# Altium PCB xxxxxx.001.PcbDoc (part 2 of 2)
Units mm, origin at the board's own origin, x right, y up, seen from the top; angles counter-clockwise.
Board outline 100 x 45 mm, 4 copper layers (Top Layer, GND Layer, Power Layer, Bottom Layer), stack 1.466 mm thick; 65 components, 66 nets, 294 pads, 231 vias.
Unrouted connection lines stored in the file: 84.
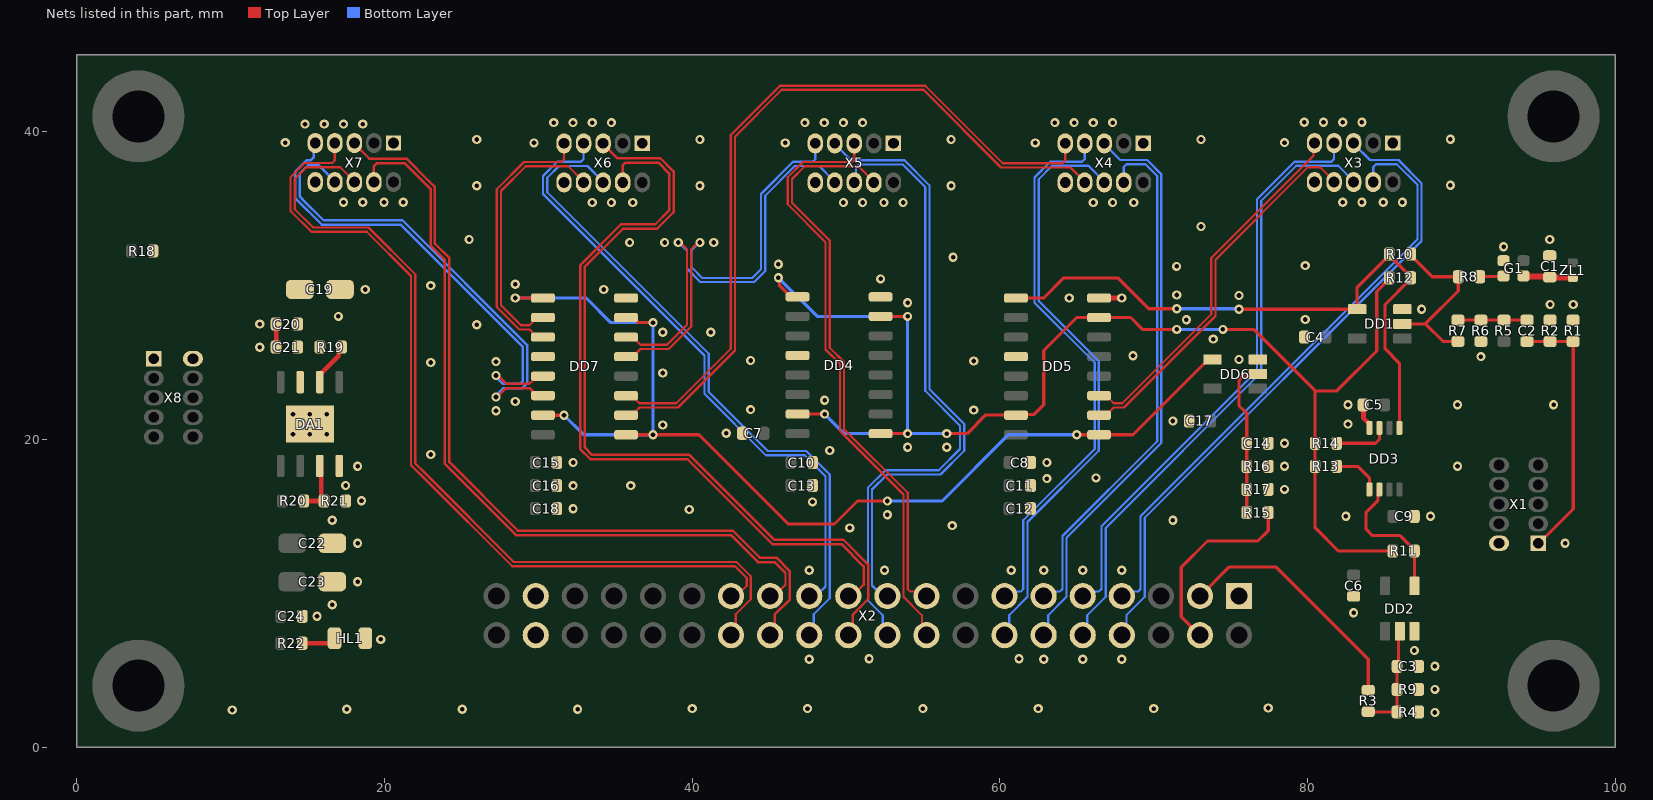
[diagram p4: the nets of this part, all layers, seen from the top]

## Via types
v1: diameter 0.6, hole 0.3, Top Layer to Bottom Layer, tented both sides, 225 vias
v2: diameter 0.6, hole 0.3, Top Layer to Bottom Layer, 6 vias

## Nets (pads, with @x,y where several pads share a name; then routed paths per layer and width w, separated by ;. In a path a pad name is that pad's centre, name@x,y a point inside that pad or via, vN(x,y) a via of type N, cw(c..) or ccw(c..) an arc to the next point about the centre after c; other vN are vias at no path point) (continued)
GND: C1.2 C3.2 C4.2 C5.2 C6.2 C7.2 C8.2 C9.2 C10.2 C11.2 C12.2 C13.2 C14.2 C15.2 C16.2 C17.2 C18.2 C19.2 C20.2 C21.2 C22.2 C23.2 C24.2 DA1.8 DA1.9 DD1.3 DD2.3 DD3.4 DD4.8 DD4.12 DD5.8 DD5.12 DD6.3 DD7.8 DD7.12 G1.2 HL1.2 R1.2 R2.2 R4.2 R6.2 R9.2 R16.2 R17.2 R21.2 X1.2 X2.1 X2.37 X2.38 X3.1 X3.10 X4.1 X4.10 X5.1 X5.10 X6.1 X6.10 X7.1 X7.10 X8.2 | length 4.6
  Top Layer w0.3: C21.2@12.95,26 C20.2@12.95,27.5 ; DD5.8@66.45,29.195 v1(67.93,29.195) ; C5.2@83.615,22.25 83.642,22.223 83.642,21.383 83.975,21.05 83.975,20.8 DD3.4@84.025,20.75
  other v1: 88.285,2.25 10.1,2.415 17.55,2.457 25.05,2.457 32.55,2.457 40,2.5 47.5,2.5 55,2.5 62.5,2.5 70,2.5 77.45,2.543 88.285,3.75 88.285,5.25 47.61,5.709 62.85,5.709 65.39,5.709 67.93,5.709 51.5,5.75 61.25,5.75 86.95,6.281 19.75,7 15.61,8.5 83,8.74 16.6,9.25 18.25,10.75 47.61,11.5 52.5,11.5 60.75,11.5 62.85,11.5 65.39,11.5 67.93,11.5 18.25,13.25 96.75,13.25 50.25,14.25 56.911,14.397 16.6,14.75 71.25,14.75 82.5,15 88,15 52.69,15.106 39.817,15.449 32.26,15.5 47.822,15.94 18.5,16.02 78.51,16.75 17.47,17.008 32.26,17 36,17 63.06,17.455 66.25,17.5 18.25,18.25 78.51,18.25 89.75,18.25 32.26,18.5 63.06,18.5 23,19.02 48.946,19.28 54.007,19.486 56.551,19.486 78.51,19.75 42.208,20.4 38.085,20.94 82.635,21 71.25,21.2 27.25,21.867 58.3,21.906 43.8,21.942 82.635,22.25 89.75,22.25 96,22.25 28.5,22.469 48.607,22.544 38.082,24.318 23,25 27.25,25.061 58.3,25.1 43.8,25.136 75.55,25.2 91.275,25.385 68.655,25.435 11.89,26 73.868,26.521 38.082,26.965 41.215,26.965 26,27.449 11.89,27.5 72.132,27.786 79.85,27.8 17,28 87.419,28.465 95.775,28.77 97.275,28.77 54.007,28.894 64.511,29.195 75.55,29.359 71.5,29.394 18.75,29.75 34.25,29.75 23,30 28.5,30.089 52.25,30.437 71.491,31.25 79.85,31.304 45.608,31.394 56.964,31.845 92.75,32.531 35.933,32.8 38.206,32.8 41.4,32.8 25.5,33 95.75,33 73.08,33.845 33.5,35.4 34.75,35.4 36.133,35.4 49.83,35.4 51.08,35.4 52.463,35.4 53.713,35.4 66.08,35.4 67.33,35.4 68.713,35.4 17.33,35.42 18.58,35.42 19.963,35.42 21.213,35.42 82.29,35.42 83.54,35.42 84.923,35.42 86.173,35.42 26,36.5 40.5,36.5 56.83,36.5 89.29,36.52 29.72,39.28 46.05,39.28 62.3,39.28 13.55,39.3 78.51,39.3 26,39.5 40.5,39.5 56.83,39.5 73.08,39.5 89.29,39.52 14.83,40.5 16.08,40.5 17.33,40.5 18.58,40.5 31,40.6 32.25,40.6 33.5,40.6 34.75,40.6 47.33,40.6 48.58,40.6 49.83,40.6 51.08,40.6 63.58,40.6 64.83,40.6 66.08,40.6 67.33,40.6 79.79,40.62 81.04,40.62 82.29,40.62 83.54,40.62
  other v2: 14.05,20.35 15.15,20.35 16.25,20.35 14.05,21.65 15.15,21.65 16.25,21.65
NetC1_1: C1.1 G1.4 ZL1.2 | length 3.3
  Top Layer w0.4: G1.4@94.05,30.625 94.088,30.588 95.712,30.588 C1.1@95.75,30.55 95.775,30.525 97.225,30.525 ZL1.2@97.25,30.5
NetC2_1: C2.1 R1.1 R2.1 X1.1 | length 17.1
  Top Layer w0.206: C2.1@94.275,26.365 R2.1@95.775,26.365 R1.1@97.275,26.365 97.275,15.475 95.05,13.25 X1.1@95,13.25
NetC2_2: C2.2 R5.2 R6.1 R7.1 | length 4.5
  Top Layer w0.206: R7.1@89.775,27.765 R6.1@91.275,27.765 R5.2@92.775,27.765 C2.2@94.275,27.765
NetC3_1: C3.1 DD2.2 R3.2 R4.1 R9.1 | length 7.2
  Top Layer w0.206: R3.2@83.95,2.3 83.96,2.29 85.815,2.29 R4.1@85.825,2.28 R9.1@85.825,3.75 C3.1@85.825,5.25 85.912,5.337 85.912,7.437 DD2.2@86,7.525
NetC14_1: C14.1 DD6.2 R15.2 R16.1 R17.1 | length 10.2
  Top Layer w0.206: R15.2@76.05,15.25 R16.1@76.05,18.25 C14.1@76.05,19.75 76.05,21.7 75.55,22.2 75.55,23.859 75.791,24.1 76.625,24.1 DD6.2@76.775,24.25
NetC19_1: C19.1 C20.1 C21.1 DA1.3 R18.2 R19.1 X8.1
NetDA1_2: DA1.2 R19.2 | length 2.9
  Top Layer w0.3: DA1.2@15.785,23.725 15.785,24.2 17.015,25.43 17.015,25.815 R19.2@17.2,26
NetDA1_7: DA1.7 R20.2 R21.1 | length 3.7
  Top Layer w0.3: R20.2@14.75,16 R21.1@16.07,16 15.893,16.177 15.893,17 15.885,17.008 15.885,18.175 DA1.7@15.785,18.275
NetDD1_2: DD1.2 R7.2 R8.2 R10.1 | length 11.8
  Top Layer w0.206: DD1.2@86.175,27.515 87.665,27.515 ; R10.1@86.715,32.05 86.715,31.975 88.115,30.575 R8.2@89.8,30.575 89.8,29.65 87.665,27.515 ; R7.2@89.775,26.365 88.815,26.365 87.665,27.515
NetDD1_4: DD1.4 DD3.1 DD5.9 R10.2 R12.1 | length 40.9
  Top Layer w0.206: DD5.9@61.05,29.195 62.855,29.195 64.16,30.5 67.678,30.5 69.678,28.5 v1(71.5,28.5) ; v1(75.55,28.465) DD1.4@83.225,28.465 83.225,29.885 85.315,31.975 R10.2@85.315,31.98 ; R10.2@85.315,32.05 R10.2@85.315,31.98 ; DD3.1@85.975,20.75 85.975,24.959 85.05,25.884 85.05,28.77 86.715,30.435 R12.1@86.715,30.51 86.715,30.58 R10.2@85.315,31.98
  Bottom Layer w0.206: v1(71.5,28.5) 75.515,28.5 v1(75.55,28.465)
NetDD2_4: DD2.4 DD3.6 R11.1 | length 9
  Top Layer w0.206: DD3.6@84.675,16.75 84.578,16.653 84.578,16.025 83.815,15.262 83.815,14.162 84.227,13.75 86.025,13.75 86.95,12.825 R11.1@86.95,12.75 DD2.4@86.95,10.475
NetDD3_3: DD3.3 R14.1 | length 3.6
  Top Layer w0.206: R14.1@81.9,19.75 84.425,19.75 84.675,20 DD3.3@84.675,20.75
NetDD3_5: DD3.5 R13.1 | length 3.2
  Top Layer w0.206: R13.1@81.9,18.25 83.275,18.25 84.025,17.5 DD3.5@84.025,16.75
NetDD4_1: DD4.1 DD4.7 DD4.9 DD4.15 DD5.7 DD5.15 R11.2 R12.2 R13.2 R14.2 | length 88.7
  Top Layer w0.206: v1(45.608,30.512) 45.683,30.437 45.683,29.987 46.4,29.27 DD4.9@46.85,29.27 ; DD4.15@46.85,21.65 v1(48.607,21.65) ; DD4.1@52.25,20.38 v1(54.007,20.38) ; DD4.7@52.25,28 v1(54.007,28) ; v1(56.551,20.38) 57.876,20.38 59.091,21.594 DD5.15@61.069,21.594 ; DD5.15@61.089,21.614 62.208,21.614 62.855,22.261 62.855,25.78 65,27.925 DD5.7@66.45,27.925 68.5,27.925 69.271,27.154 v1(71.5,27.154) ; v1(74.5,27.154) 76.5,27.154 80.5,23.154 ; R12.2@85.315,30.51 85.315,30.435 84.5,29.62 84.5,25.75 81.904,23.154 80.5,23.154 ; R11.2@85.55,12.75 82,12.75 80.5,14.25 R13.2@80.5,18.25 R14.2@80.5,19.75 80.5,23.154
  Bottom Layer w0.206: v1(45.608,30.512) 48.12,28 v1(54.007,28) v1(54.007,20.38) ; v1(48.607,21.65) 49.877,20.38 v1(54.007,20.38) ; v1(56.551,20.38) v1(54.007,20.38) ; v1(71.5,27.154) v1(74.5,27.154)
NetDD5_1: DD5.1 DD6.4 DD7.1 DD7.7 DD7.9 DD7.15 | length 73.2
  Top Layer w0.206: v1(28.5,29.195) DD7.9@30.3,29.195 ; DD7.15@30.3,21.575 v1(31.67,21.575) ; DD7.1@35.7,20.305 v1(37.457,20.305) 40.445,20.305 46.25,14.5 49.25,14.5 50.75,16 v1(52.69,16) ; DD7.7@35.7,27.925 36.2,27.925 36.528,27.597 v1(37.45,27.597) ; v1(65,20.305) DD5.1@66.45,20.305 68.655,20.305 73.55,25.2 DD6.4@73.825,25.2
  Bottom Layer w0.206: v1(28.5,29.195) 33.112,29.195 34.71,27.597 v1(37.45,27.597) 37.453,27.594 37.453,20.308 v1(37.457,20.305) 32.94,20.305 v1(31.67,21.575) ; v1(52.69,16) 56.25,16 60.555,20.305 v1(65,20.305)
NetG1_3: G1.3 R8.1 | length 1.6
  Top Layer w0.206: R8.1@91.2,30.575 91.225,30.6 92.725,30.6 G1.3@92.75,30.625
NetHL1_1: HL1.1 R22.2 | length 2.3
  Top Layer w0.3: R22.2@14.65,6.75 16.456,6.75 16.75,7.044 HL1.1@16.75,7.075
NetR3_1: R3.1 X2.3 | length 16.2
  Top Layer w0.206: X2.3@73.01,9.815 74.895,11.7 77.959,11.7 83.95,5.709 R3.1@83.95,3.7
SCK1_N: DD5.3 X3.9 | length 23.8
  Top Layer w0.146: DD5.3@66.45,22.845 66.899,22.845 67.398,22.346 67.961,22.346 73.748,28.134 73.748,31.795 80.393,38.441 80.393,39.203 X3.9@80.46,39.27
SCK1_P: DD5.2 X3.8 | length 24.5
  Top Layer w0.146: DD5.2@66.45,21.575 66.899,21.575 67.398,22.074 68.074,22.074 74.021,28.021 74.021,31.682 80.026,37.688 80.822,37.688 81.73,36.78 X3.8@81.73,36.73
SCK2_N: DD7.3 X4.9 | length 48.8
  Top Layer w0.146: DD7.3@35.7,22.845 36.133,22.845 36.402,22.576 36.402,22.517 36.573,22.346 38.958,22.346 42.508,25.897 42.508,39.795 45.713,43 55.148,43 60.191,37.956 64.079,37.956 64.25,38.127 X4.9@64.25,39.25
SCK2_P: DD7.2 X4.8 | length 49.3
  Top Layer w0.146: DD7.2@35.7,21.575 36.133,21.575 36.402,21.844 36.402,21.903 36.573,22.074 39.071,22.074 42.781,25.784 42.781,39.682 45.826,42.727 55.035,42.727 60.078,37.684 64.596,37.684 65.52,36.76 X4.8@65.52,36.71
SCK3_N: DD7.5 X5.9 | length 28.1
  Top Layer w0.146: DD7.5@35.7,25.385 36.149,25.385 36.648,25.884 38.484,25.884 39.936,27.336 39.936,32.371 40.107,32.542 40.119,32.542 40.377,32.8 v1(40.5,32.8)
  Bottom Layer w0.146: v1(40.5,32.8) 40.458,32.8 39.936,32.278 39.936,31.22 40.657,30.5 43.901,30.5 44.47,31.069 44.47,35.96 46.558,38.048 47.829,38.048 48,38.219 X5.9@48,39.25
SCK3_P: DD7.6 X5.8 | length 28.8
  Top Layer w0.146: DD7.6@35.7,26.655 36.149,26.655 36.648,26.156 38.371,26.156 39.664,27.449 39.664,32.371 39.493,32.542 39.481,32.542 39.223,32.8 v1(39.1,32.8)
  Bottom Layer w0.146: v1(39.1,32.8) 39.142,32.8 39.664,32.278 39.664,31.107 40.544,30.227 44.014,30.227 44.743,30.956 44.743,35.847 46.671,37.775 48.255,37.775 49.27,36.76 X5.8@49.27,36.71
SCK4_N: DD7.11 X6.9 | length 17.7
  Top Layer w0.146: DD7.11@30.3,26.655 29.867,26.655 29.598,26.924 29.598,26.983 29.427,27.154 28.761,27.154 27.302,28.612 27.302,36.261 29.072,38.031 31.499,38.031 31.67,38.202 X6.9@31.67,39.25
SCK4_P: DD7.10 X6.8 | length 17.4
  Top Layer w0.146: DD7.10@30.3,27.925 29.867,27.925 29.598,27.656 29.598,27.597 29.427,27.426 28.874,27.426 27.575,28.725 27.575,36.148 29.185,37.758 31.942,37.758 32.94,36.76 X6.8@32.94,36.71
SCK5_N: DD7.13 X7.9 | length 30.9
  Top Layer w0.162: v1(27.25,24.161) 27.368,24.161 27.904,23.625 29.416,23.625 29.606,23.815 29.606,23.859 29.862,24.115 DD7.13@30.3,24.115
  Bottom Layer w0.162: X7.9@15.5,39.27 15.409,39.179 15.409,38.35 15.219,38.16 14.956,38.16 14.211,37.414 14.211,35.669 15.919,33.961 21.039,33.961 29,26 29,23.795 28.81,23.605 27.98,23.605 27.711,23.605 27.25,24.067 v1(27.25,24.161)
SCK5_P: DD7.14 X7.8 | length 31.7
  Top Layer w0.162: v1(27.25,22.761) 27.328,22.761 27.903,23.335 29.416,23.335 29.606,23.145 29.606,23.101 29.862,22.845 DD7.14@30.3,22.845
  Bottom Layer w0.162: X7.8@16.77,36.73 16.77,36.78 15.68,37.87 15.076,37.87 14.5,37.294 14.5,35.789 14.68,35.609 16.039,34.25 21.159,34.25 29.289,26.12 29.289,23.676 28.93,23.316 28.1,23.316 27.711,23.316 27.25,22.855 v1(27.25,22.761)
SCK_IN: R15.1 X2.4 | length 12.7
  Top Layer w0.206: X2.4@73.01,7.275 71.8,8.485 71.8,11.7 73.5,13.4 76.775,13.4 77.45,14.075 R15.1@77.45,15.25
SDA_11_N: X2.7 X3.4 | length 39.6
  Bottom Layer w0.146: X2.7@67.93,9.815 68.222,10.107 68.978,10.107 69.149,10.278 69.149,15.015 87.146,33.012 87.146,36.55 85.809,37.887 84.45,37.887 84.28,37.716 84.28,36.74 X3.4@84.27,36.73
SDA_11_P: X2.8 X3.5 | length 43
  Bottom Layer w0.146: X2.8@67.93,7.275 68.227,7.572 68.227,8.576 69.422,9.771 69.422,14.902 87.419,32.899 87.419,36.663 85.922,38.16 84.06,38.16 83,39.22 X3.5@83,39.27
SDA_12_N: X2.9 X3.7 | length 38.1
  Bottom Layer w0.146: X2.9@65.39,9.815 65.682,10.107 66.438,10.107 66.609,10.278 66.609,14.359 76.727,24.477 76.727,35.634 79.152,38.058 81.559,38.058 81.73,38.229 X3.7@81.73,39.27
SDA_12_P: X2.10 X3.6 | length 40.5
  Bottom Layer w0.146: X2.10@65.39,7.275 65.687,7.572 65.687,8.576 66.882,9.771 66.882,14.246 77,24.364 77,35.521 79.265,37.786 81.994,37.786 83,36.78 X3.6@83,36.73
SDA_21_N: X2.11 X4.4 | length 34.4
  Bottom Layer w0.146: X2.11@62.85,9.815 63.142,10.107 63.898,10.107 64.069,10.278 64.069,13.728 70.227,19.886 70.227,37.127 69.468,37.887 68.231,37.887 68.06,37.716 X4.4@68.06,36.71
SDA_21_P: X2.12 X4.5 | length 37.7
  Bottom Layer w0.146: X2.12@62.85,7.275 63.147,7.572 63.147,8.576 64.342,9.771 64.342,13.615 70.5,19.773 70.5,37.24 70.42,37.32 69.661,38.08 69.581,38.16 67.83,38.16 66.79,39.2 X4.5@66.79,39.25
SDA_22_N: X2.13 X4.7 | length 36.5
  Bottom Layer w0.146: X2.13@60.31,9.815 60.602,10.107 61.358,10.107 61.529,10.278 61.529,14.75 66.166,19.386 66.166,24.98 62.338,28.807 62.258,28.887 62.258,37.035 63.282,38.058 65.349,38.058 65.52,38.229 X4.7@65.52,39.25
SDA_22_P: X2.14 X4.6 | length 38.9
  Bottom Layer w0.146: X2.14@60.31,7.275 60.607,7.572 60.607,8.576 61.802,9.771 61.802,14.637 66.438,19.273 66.438,25.093 62.531,29 62.531,36.922 63.395,37.786 65.764,37.786 66.79,36.76 X4.6@66.79,36.71
SDA_31_N: X2.17 X5.4 | length 37.3
  Top Layer w0.146: X5.4@51.81,36.71 51.81,36.76 50.812,37.758 47.315,37.758 46.492,36.935 46.492,35.395 48.946,32.941 48.946,25.961 49.877,25.031 49.877,20.666 54.011,16.531 54.011,10.278 54.182,10.107 54.938,10.107 X2.17@55.23,9.815
SDA_31_P: X2.18 X5.5 | length 39.4
  Top Layer w0.146: X5.5@50.54,39.25 50.54,38.202 50.369,38.031 47.202,38.031 46.219,37.048 46.219,35.282 48.674,32.828 48.674,25.848 49.604,24.918 49.604,20.553 53.738,16.418 53.738,9.771 54.933,8.576 54.933,7.572 X2.18@55.23,7.275
SDA_32_N: X2.19 X5.7 | length 40.1
  Bottom Layer w0.146: X5.7@49.27,39.25 49.27,39.2 50.327,38.143 53.8,38.143 55.42,36.523 55.42,23.274 57.69,21.004 57.69,19.273 56.144,17.727 52.684,17.727 51.695,16.739 51.695,10.502 52.382,9.815 X2.19@52.69,9.815
SDA_32_P: X2.20 X5.6 | length 41.3
  Bottom Layer w0.146: X5.6@50.54,36.71 50.658,36.828 50.658,37.7 50.829,37.87 53.687,37.87 55.147,36.41 55.147,23.161 57.417,20.891 57.417,19.386 56.031,18 52.571,18 51.422,16.852 51.422,9.547 52.393,8.576 52.393,7.572 X2.20@52.69,7.275
SDA_41_N: X2.21 X6.4 | length 50.2
  Top Layer w0.162: X6.4@35.48,36.71 35.48,37.806 35.67,37.996 37.804,37.996 38.5,37.3 38.5,34.889 37.6,33.989 35.38,33.989 32.711,31.32 32.711,19.38 33.38,18.711 39.697,18.711 45.208,13.2 49.7,13.2 51.148,11.752 51.148,10.554 50.41,9.815 X2.21@50.15,9.815
SDA_41_P: X2.22 X6.5 | length 53.7
  Top Layer w0.162: X6.5@34.21,39.25 34.21,39.2 35.125,38.285 37.924,38.285 38.789,37.42 38.789,34.769 37.72,33.7 35.5,33.7 33,31.2 33,19.5 33.5,19 39.817,19 45.328,13.489 49.82,13.489 51.437,11.872 51.437,9.609 50.444,8.616 50.444,7.569 X2.22@50.15,7.275
SDA_42_N: X2.23 X6.7 | length 41.2
  Bottom Layer w0.146: X6.7@32.94,39.25 32.94,38.219 32.769,38.048 31.227,38.048 30.3,37.121 30.3,35.956 40.804,25.452 40.804,22.965 44.791,18.977 47.311,18.977 48.674,17.614 48.674,10.434 48.503,10.263 48.478,10.263 48.031,9.815 X2.23@47.61,9.815
SDA_42_P: X2.24 X6.6 | length 43.8
  Bottom Layer w0.146: X6.6@34.21,36.71 34.21,36.76 33.195,37.775 31.34,37.775 30.573,37.008 30.573,36.069 41.076,25.565 41.076,23.078 44.904,19.25 47.424,19.25 48.946,17.727 48.946,9.669 47.907,8.63 47.907,7.572 X2.24@47.61,7.275
SDA_51_N: X2.25 X7.4 | length 50.9
  Top Layer w0.162: X7.4@19.31,36.73 19.31,37.775 19.5,37.966 21.311,37.966 22.795,36.481 22.991,36.286 22.991,32.6 23.921,31.669 23.921,18.404 28.54,13.785 42.515,13.785 44.275,12.025 45.349,12.025 46.067,11.307 46.067,10.555 45.327,9.815 X2.25@45.07,9.815
SDA_51_P: X2.26 X7.5 | length 54.5
  Top Layer w0.162: X7.5@18.04,39.27 18.04,39.22 19.005,38.255 21.431,38.255 22.901,36.785 23.28,36.406 23.28,32.72 24.211,31.789 24.211,18.524 28.66,14.074 42.635,14.074 44.395,12.314 45.469,12.314 46.356,11.427 46.356,9.608 45.364,8.616 45.364,7.569 X2.26@45.07,7.275
SDA_52_N: X2.27 X7.7 | length 55.2
  Top Layer w0.146: X7.7@16.77,39.27 16.77,38.137 16.599,37.966 14.81,37.966 13.887,37.043 13.887,34.858 13.967,34.778 15.245,33.5 18.852,33.5 21.727,30.625 21.727,18.33 22.602,17.455 28.305,11.752 42.789,11.752 43.541,11 43.541,10.487 42.869,9.815 X2.27@42.53,9.815
SDA_52_P: X2.28 X7.6 | length 57.7
  Top Layer w0.146: X7.6@18.04,36.73 18.04,36.78 17.127,37.693 14.923,37.693 14.16,36.929 14.16,34.971 15.358,33.773 18.965,33.773 22,30.738 22,18.443 22.693,17.75 28.418,12.025 42.902,12.025 43.814,11.113 43.814,9.617 42.827,8.63 42.827,7.572 X2.28@42.53,7.275
pads on no net: DA1.1 DA1.4 DA1.5 DD1.1 DD2.1 DD6.1 G1.1 X1.3 X1.4 X1.5 X1.6 X1.7 X1.8 X1.9 X1.10 X2.29 X2.30 X2.31 X2.32 X2.33 X2.34 X2.35 X2.36 X2.39 X2.40 X8.3 X8.4 X8.5 X8.6 X8.7 X8.8 X8.9 X8.10

## Polygon pours and split planes (outlines as drawn)
GND on Top Layer "NONET" (solid, remove dead copper, pour order 23): 0,45 0,0 100,0 100,45
NetC19_1 on Top Layer "Top Layer-NetC19_1" (solid, pour order 14): 13.785,25.15 13.887,25.05 13.887,23.408 15.286,23.408 15.286,24.631 16.5,25.498 16.5,27.656 15.801,28.355 15.801,29.026 15.787,31.614 13.628,33.773 5.023,33.773 4.25,33 4.25,30.75 2.5,29 2.5,24.25 3.605,23.145 10.33,23.145 11,23.815 11,28 11.612,28.612 13.386,28.612 13.785,28.213
+3,3VDD on Top Layer "NONET" (solid, pour order 0): 98.992,30.955 98.992,33.259 98.251,34 96.704,34 96.704,30.977 96.726,30.955
+3,3VDD on Top Layer "NONET" (solid, remove dead copper, pour order 20): 10.377,18.611 15.243,18.611 15.243,17.008 14.404,15.25 14.743,14.75 15.243,14.25 15.243,9.655 14.837,9.25 14,9.25 14,5.85 13.65,5.5 9.5,5.5 9,6 9,17.497
+5VDD on Top Layer "NONET" (solid, pour order 13): 4,33 3.25,33.75 3.25,33.773 1.023,33.773 0.25,33 0.25,30.682 0.67,30.262 3.638,30.262 4,30.625
+3,3VDD on Top Layer "NONET" (solid, pour order 11): 27.751,19.75 28.805,20.804 31.7,20.804 31.7,19.811 30.5,18.611 30.5,15.25 28.5,15.25 27.751,15.999 27.751,19.739 28.794,20.782
+3,3VDD on Top Layer "NONET" (solid, pour order 8): 59.049,20.804 62.5,20.804 62.5,19.811 61.3,18.611 61.3,13.031 60.802,12.533 58.442,12.533 57.638,13.337 57.638,19.393
+3,3VDD on Top Layer "NONET" (solid, pour order 7): 47.122,16.225 47.122,18.872 48,19.75 48.5,20.25 48.5,20.85 48.35,21 46.227,21 45.153,22.074 44.709,22.074 43.886,21.25 43.886,17.564 45.655,15.795 46.692,15.795
+3,3VDD on Top Layer "NONET" (solid, pour order 5): 81.025,12.161 81.364,12.5 84.65,12.5 86.025,11.125 86.025,9.55 85.725,9.25 84.275,9.25 83.789,9.736 83.789,10.475 81.475,10.475 81.025,10.925
+3,3VDD on Top Layer "NONET" (solid, pour order 3): 83.687,27.597 80.993,27.597 80.822,27.426 80.822,24.427 80.932,24.318 82.361,24.318 83.891,25.851 83.891,27.394
+3,3VDD on Top Layer "NONET" (solid, pour order 2): 74.5,24.318 75.25,23.568 75.25,17.008 74.774,16.531 73.218,16.531 73.01,16.74 73.01,21.82 72.31,22.52 72.31,23.618 73.01,24.318
+3,3VDD on Top Layer "NONET" (solid, pour order 1): 85.298,18 86.595,18 86.845,17.75 86.845,16.25 86.292,15.697 86.25,15.697 86.25,14.325 86,14.075 84.85,14.075 84.578,14.347 84.578,15.588 85.015,16.025 85,17.7
GND on Bottom Layer "NONET" (solid, remove dead copper, pour order 21): 0,45 0,0 100,0 100,45
+5VDD on Bottom Layer "NONET" (solid, remove dead copper, pour order 16): 0.25,0.5 78.5,0.5 79.25,1.25 79.25,11.75 78.75,12.25 72.382,12.25 71.75,11.618 71.75,5.689 71.311,5.25 18.5,5.25 10.75,13 10.75,25 4.25,31.5 4.25,33.25 3.5,34 1.25,34 0.25,33
GND on Power Layer "NONET" (solid, pour order 22): 0,45 0,0 100,0 100,45
+3,3VDD on Power Layer "NONET" (solid, pour order 18): 9.75,0.5 9,1.25 9,13.5 10.25,14.75 21.75,14.75 26,19 43.674,19 44.424,18.25 46.596,18.25 47.469,17.377 47.469,12.219 46.5,11.25 46.5,6 47.25,5.25 52,5.25 52.75,6 52.75,14.25 53.606,15.106 56.481,15.106 59.875,18.5 61.75,18.5 62,18.25 62,16.5 61.25,15.75 61.25,13.08 60.31,12.14 60.31,5.917 60.977,5.25 77,5.25 79.25,7.5 79.25,11.695 78.389,12.556 74.796,12.556 72.801,14.551 72.801,16.8 74.764,18.763 79.25,23.249 88,31.999 91.001,35 98.75,35 99.5,34.25 99.5,1.25 98.75,0.5
GND on GND Layer "NONET" (solid, pour order 19): 0,45 0,0 100,0 100,45

## Keep-outs
Power Layer:
  lines w0.25: 9,1.25 9.75,0.5 90.25,0.5 97.375,0.5 98.75,0.5 99.5,1.25 99.5,34.25 98.75,35 91.001,35 88,31.999 79.25,23.249 74.764,18.763 72.801,16.8 72.801,14.551 74.796,12.556 78.389,12.556 79.25,11.695 79.25,10.67 79.25,7.5 77,5.25 60.978,5.25 60.31,5.917 60.31,12.14 61.25,13.08 61.25,15.75 62,16.5 62,18.25 61.75,18.5 59.875,18.5 56.481,15.106 53.606,15.106 52.75,14.25 52.75,6 52,5.25 47.25,5.25 46.5,6 46.5,11.25 47.469,12.219 47.469,17.377 46.596,18.25 44.424,18.25 43.674,19 26,19 21.75,14.75 10.25,14.75 9,13.5 9,1.25
Bottom Layer:
  lines w0.25: 0.25,0.5 0.25,8.25 0.25,33 1.25,34 3.5,34 4.25,33.25 4.25,31.5 10.75,25 10.75,13 18.5,5.25 71.311,5.25 71.75,5.689 71.75,11.618 72.382,12.25 78.75,12.25 79.25,11.75 79.25,1.25 78.5,0.5 9.75,0.5 0.25,0.5
Keep-Out Layer:
  region: 26.6,22.811 26.6,24.111 cw(c27.25,24.111) 27.9,24.111 27.9,22.811 cw(c27.25,22.811)
  region: 43.15,22.886 43.15,24.186 cw(c43.8,24.186) 44.45,24.186 44.45,22.886 cw(c43.8,22.886)
  region: 39.15,33.45 40.45,33.45 cw(c40.45,32.8) 40.45,32.15 39.15,32.15 cw(c39.15,32.8)
  region: 57.65,22.85 57.65,24.15 cw(c58.3,24.15) 58.95,24.15 58.95,22.85 cw(c58.3,22.85)

## Silkscreen, mask and mechanical layers (free items; w line width, h text height)
Top Overlay:
  lines w0.15: 9,13.5 11.75,13.5 12,13.75 12,14.987 12.513,15.5
  text "CH5" at 16.7,42.7 h2.5
  text "CH4" at 32.9,42.7 h2.5
  text "CH3" at 49.2,42.7 h2.5
  text "CH2" at 65.4,42.7 h2.5
  text "CH1" at 81.8,42.7 h2.5
  text "+6 В" at 2.27,13.25 h2.5
  text "GCLK_IN" at 92.25,1.88 h2.5 r90
  text "FPGA" at 22.21,1.75 h2.5
Dimension:
  lines w0.381: 116.816,5.51 127.228,5.51 150.843,5.51 172.681,5.51 189.187,5.51 203.662,5.51 ; 116.816,8.558 127.228,8.558 150.843,8.558 172.681,8.558 189.187,8.558 203.662,8.558 ; 116.816,11.606 127.228,11.606 150.843,11.606 172.681,11.606 189.187,11.606 203.662,11.606 ; 116.816,14.654 127.228,14.654 150.843,14.654 172.681,14.654 189.187,14.654 203.662,14.654 ; 116.816,17.702 127.228,17.702 150.843,17.702 172.681,17.702 189.187,17.702 203.662,17.702 ; 116.816,20.75 127.228,20.75 150.843,20.75 172.681,20.75 189.187,20.75 203.662,20.75 ; 116.816,23.798 127.228,23.798 150.843,23.798 172.681,23.798 189.187,23.798 203.662,23.798 ; 116.816,26.846 127.228,26.846 150.843,26.846 172.681,26.846 189.187,26.846 203.662,26.846 ; 116.816,29.894 127.228,29.894 150.843,29.894 172.681,29.894 189.187,29.894 203.662,29.894 ; 116.816,32.942 127.228,32.942 150.843,32.942 172.681,32.942 189.187,32.942 203.662,32.942 ; 116.816,35.99 203.662,35.99 ; 127.228,39.038 127.228,2.462 ; 150.843,39.038 150.843,2.462 ; 172.681,39.038 172.681,2.462 ; 189.187,39.038 189.187,2.462 ; 127.228,2.462 116.816,2.462 116.816,39.038 203.662,39.038 203.662,2.462 189.187,2.462 ; 127.228,2.462 150.843,2.462 ; 150.843,2.462 172.681,2.462 ; 172.681,2.462 189.187,2.462
  text "Layer" at 118.594,36.752 h1.52
  text "Name" at 129.006,36.752 h1.52
  text "Material" at 152.621,36.752 h1.52
  text "Thickness" at 174.459,36.752 h1.52
  text "Constant" at 190.965,36.752 h1.52
  text "Top Overlay" at 129.006,33.704 h1.52
  text "Top Solder" at 129.006,30.656 h1.52
  text "Solder Resist" at 152.621,30.656 h1.52
  text "0,010mm" at 174.459,30.656 h1.52
  text "3,5" at 190.965,30.656 h1.52
  text "1" at 118.594,27.608 h1.52
  text "Top Layer" at 129.006,27.608 h1.52
  text "Copper" at 152.621,27.608 h1.52
  text "0,018mm" at 174.459,27.608 h1.52
  text "Dielectric 1" at 129.006,24.56 h1.52
  text "FR4 PR" at 152.621,24.56 h1.52
  text "0,115mm" at 174.459,24.56 h1.52
  text "4,2" at 190.965,24.56 h1.52
  text "2" at 118.594,21.512 h1.52
  text "GND Layer" at 129.006,21.512 h1.52
  text "Copper" at 152.621,21.512 h1.52
  text "0,018mm" at 174.459,21.512 h1.52
  text "Dielectric1" at 129.006,18.464 h1.52
  text "FR4 Tg150" at 152.621,18.464 h1.52
  text "1,164mm" at 174.459,18.464 h1.52
  text "4,6" at 190.965,18.464 h1.52
  text "3" at 118.594,15.416 h1.52
  text "Power Layer" at 129.006,15.416 h1.52
  text "Copper" at 152.621,15.416 h1.52
  text "0,018mm" at 174.459,15.416 h1.52
  text "Dielectric 2" at 129.006,12.368 h1.52
  text "FR4 PR" at 152.621,12.368 h1.52
  text "0,115mm" at 174.459,12.368 h1.52
  text "4,2" at 190.965,12.368 h1.52
  text "4" at 118.594,9.32 h1.52
  text "Bottom Layer" at 129.006,9.32 h1.52
  text "Copper" at 152.621,9.32 h1.52
  text "0,018mm" at 174.459,9.32 h1.52
  text "Bottom Solder" at 129.006,6.272 h1.52
  text "Solder Resist" at 152.621,6.272 h1.52
  text "0,010mm" at 174.459,6.272 h1.52
  text "3,5" at 190.965,6.272 h1.52
  text "Bottom Overlay" at 129.006,3.224 h1.52
  text "Total board thickness:" at 118.594,0.176 h1.52
  text "1,486mm" at 174.459,0.176 h1.52
Drill Drawing:
  circle w0.254: c3.151,64.179 r0.847
  lines w0.254: 2.304,67.142 3.998,67.142 3.998,68.835 2.304,68.835 2.304,67.142 ; 2.304,72.645 3.998,72.645 3.151,70.952 2.304,72.645 ; 2.304,75.185 2.728,75.185 3.151,74.762 3.574,75.185 3.998,75.185 3.574,75.609 3.998,76.032 3.574,76.032 3.151,76.455 2.728,76.032 2.304,76.032 2.728,75.609 2.304,75.185
  lines w0.381: 0.786,62.189 195.093,62.189 ; 0.786,77.429 195.093,77.429 ; 14.778,58.379 14.778,81.239 ; 30.014,58.379 30.014,81.239 ; 59.723,58.379 59.723,81.239 ; 72.572,58.379 72.572,81.239 ; 91.211,58.379 91.211,81.239 ; 129.3,58.379 129.3,81.239 ; 144.282,58.379 144.282,81.239 ; 163.225,58.379 163.225,81.239 ; 0.786,58.379 195.093,58.379 195.093,81.239 0.786,81.239 0.786,58.379
  text "Symbol" at 3.072,78.572 h1.83
  text "Count" at 15.921,78.572 h1.83
  text "Hole Size" at 31.157,78.572 h1.83
  text "Plated" at 60.866,78.572 h1.83
  text "Hole Type" at 73.715,78.572 h1.83
  text "Drill Layer Pair" at 92.354,78.572 h1.83
  text "Via/Pad" at 130.443,78.572 h1.83
  text "Pad Shape" at 145.425,78.572 h1.83
  text "Template" at 164.368,78.572 h1.83
  text "4" at 15.921,74.762 h1.52
  text "3,400mm (133,86mil)" at 31.157,74.762 h1.52
  text "PTH" at 60.866,74.762 h1.52
  text "Round" at 73.715,74.762 h1.52
  text "Top Layer - Bottom Layer" at 92.354,74.762 h1.52
  text "Pad" at 130.443,74.762 h1.52
  text "Rounded" at 145.425,74.762 h1.52
  text "c600h340_2670034071" at 164.368,74.762 h1.52
  text "40" at 15.921,70.952 h1.52
  text "1,100mm (43,31mil)" at 31.157,70.952 h1.52
  text "PTH" at 60.866,70.952 h1.52
  text "Round" at 73.715,70.952 h1.52
  text "Top Layer - Bottom Layer" at 92.354,70.952 h1.52
  text "Pad" at 130.443,70.952 h1.52
  text "(Mixed)" at 145.425,70.952 h1.52
  text "(Mixed)" at 164.368,70.952 h1.52
  text "70" at 15.921,67.142 h1.52
  text "0,700mm (27,56mil)" at 31.157,67.142 h1.52
  text "PTH" at 60.866,67.142 h1.52
  text "Round" at 73.715,67.142 h1.52
  text "Top Layer - Bottom Layer" at 92.354,67.142 h1.52
  text "Pad" at 130.443,67.142 h1.52
  text "(Mixed)" at 145.425,67.142 h1.52
  text "(Mixed)" at 164.368,67.142 h1.52
  text "231" at 15.921,63.332 h1.52
  text "0,300mm (11,81mil)" at 31.157,63.332 h1.52
  text "PTH" at 60.866,63.332 h1.52
  text "Round" at 73.715,63.332 h1.52
  text "Top Layer - Bottom Layer" at 92.354,63.332 h1.52
  text "Via" at 130.443,63.332 h1.52
  text "Rounded" at 145.425,63.332 h1.52
  text "(Mixed)" at 164.368,63.332 h1.52
  text "345 Total" at 15.921,59.522 h1.52
Board:
  the board outline again, w0.2

## Dimensions
4,41 to 96,41 on Dimension
4,4 to 4,41 on Dimension
100,45 to 100,0 on Dimension
0,0 to 100,0 on Dimension